# Altium PCB WCH-Link-R1-1v1.PcbDoc
Units mm, origin at the board's own origin, x right, y up, seen from the top; angles counter-clockwise.
Board outline 49.64 x 19.25 mm, 2 copper layers (Top Layer, Bottom Layer), stack 1.671 mm thick; 23 components, 21 nets, 75 pads, 156 vias.
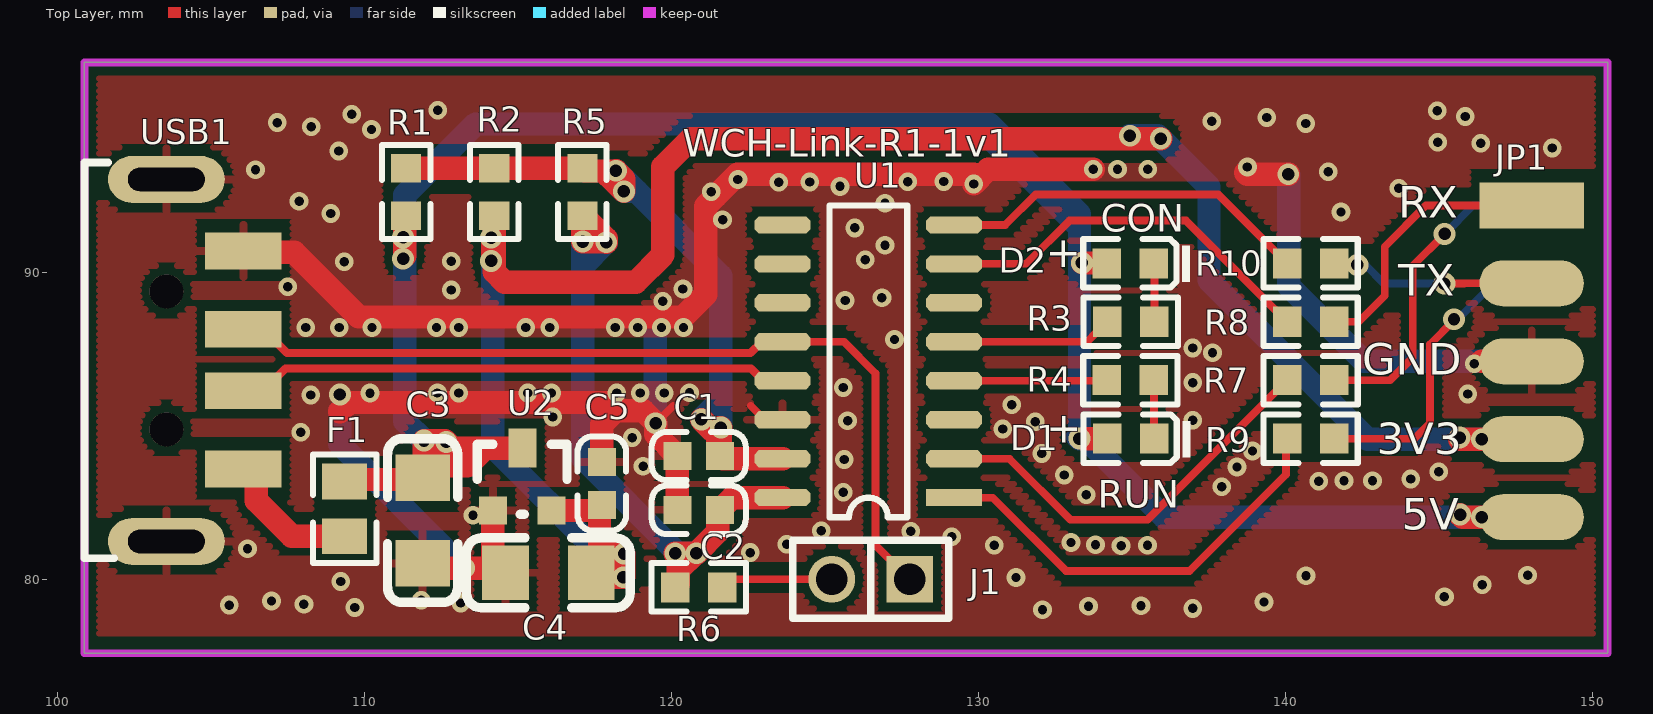
[diagram p0: Top Layer view]
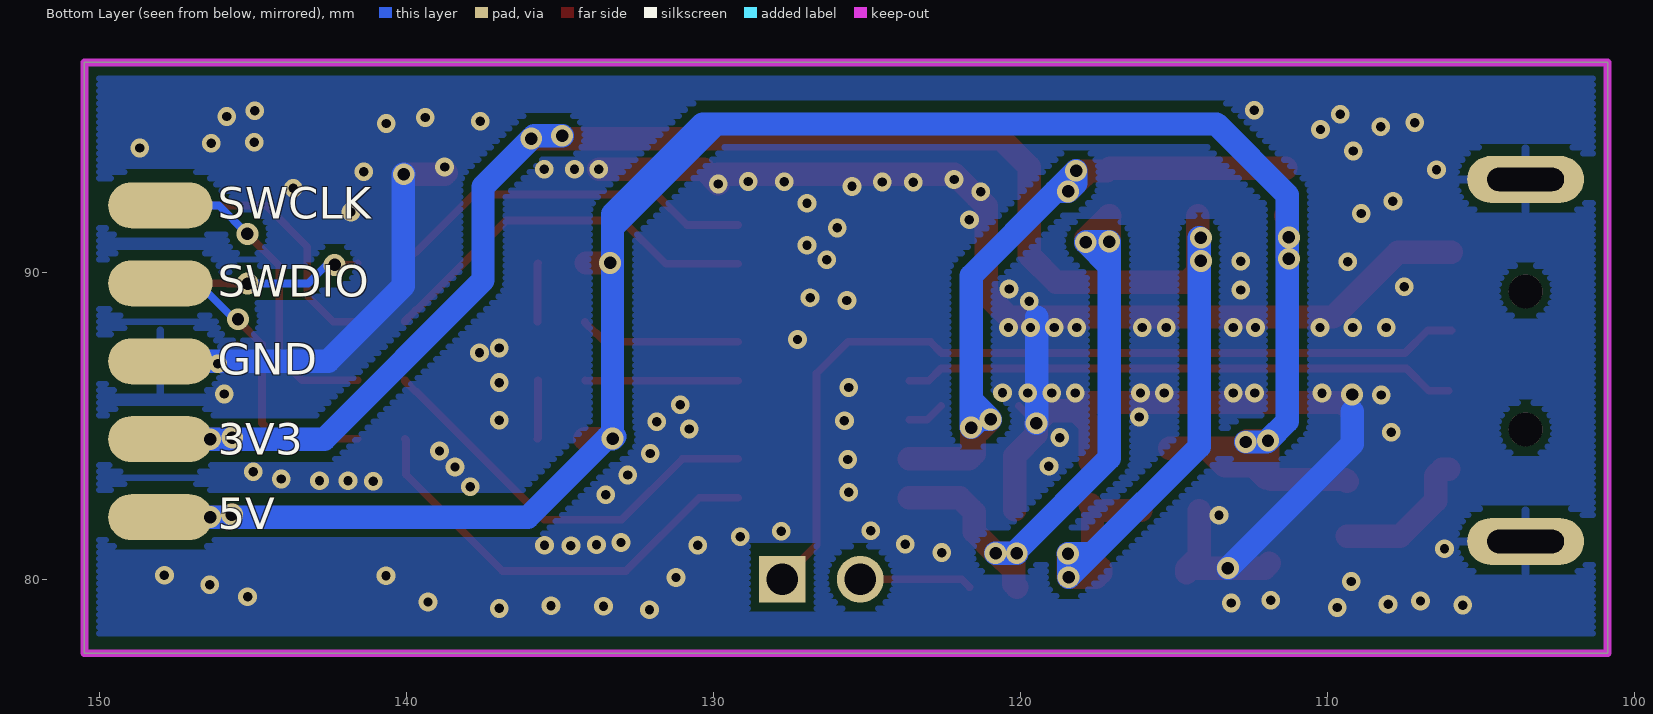
[diagram p1: Bottom Layer view, seen from below]

## Layer stack, top to bottom
Top Solder: solder mask 0.0102, Solder Resist, Dk 3.5
Top Layer: signal copper 0.0356
Dielectric 1: dielectric 1.6, FR-4, Dk 4.8
Bottom Layer: signal copper 0.0356
Bottom Solder: solder mask 0.0102, Solder Resist, Dk 3.5

## Board outline
100.867,77.591 150.507,77.591 150.507,96.844 100.867,96.844

## Design rules (kind name [scope] priority, off if disabled: settings)
Clearance Clearance_1 [InPolygon] p1: gap=0.254
Clearance [All] p2: gap=0.203
ComponentClearance [All] p1 off: gap=0.254 collisioncheckmode=3 verticalgap=0.254 showdistances=FALSE
MinimumSolderMaskSliver [All] p1 off: minsoldermaskwidth=0.254
PolygonConnect PolygonConnect_1 [IsVia] p1: connectstyle=Direct reliefconductorwidth=0.254 reliefentries=4 polygonreliefangle="90 Angle" airgapwidth=0.254
PolygonConnect [All] p2: connectstyle=Relief reliefconductorwidth=0.254 reliefentries=4 polygonreliefangle="90 Angle" airgapwidth=0.254
RoutingVias [All] p1: holewidth=0.406 width=0.711 viastyle="Through Hole" minholewidth=0.305 minwidth=0.61 maxholewidth=0.711 maxwidth=1.27
SilkToSilkClearance [All] p1 off: silktosilkclearance=0.254
SilkToSolderMaskClearance [IsPad] p1 off: minsilkscreentomaskgap=0.254 clearancetoexposedcopper=TRUE
SolderMaskExpansion [All] p1: expansion=0.102
UnpouredPolygon [All] p1: allowunpoured=FALSE
Width [All] p1: maxlimit=1.524 minlimit=0.203 preferedwidth=0.254
25 further rules are at their usual default settings.

## Components (designator, comment, footprint, x,y, rotation, side; value= is the part's Value field where it differs from the comment)
C1 "0.1uF" 0603_C 121.586,84.015 r180 top
C2 "0.1uF" 0603_C 121.586,82.262 r180 top
C3 "10uF" 3216_C 111.887,83.312 r90 top
C4 "10uF" 3216_C 117.384,80.21 r0 top
C5 "0.1uF" 0603_C 117.729,82.423 r90 top
D1 "RED" 0603+ 134.198,84.582 r0 top
D2 "BLUE" 0603+ 134.182,90.297 r0 top
F1 "500mA" 0805 109.347,81.407 r90 top
J1 "Header 2" SIP2-2.54MM 127.764,80 r270 top
JP1 "Header 5*2" IDCS10-2.54mm 148.034,92.185 r0 top
R1 "0" 0603 111.351,93.391 r270 top
R2 "0" 0603 114.224,93.391 r270 top
R3 "1K" 0603 134.198,88.392 r0 top
R4 "1K" 0603 134.182,86.487 r0 top
R5 "0" 0603 117.096,93.391 r270 top
R6 "4.7K" 0603 121.658,79.738 r180 top
R7 "1K" 0603 141.601,86.487 r180 top
R8 "1K" 0603 141.601,88.392 r180 top
R9 "1K" 0603 141.601,84.582 r180 top
R10 "1K" 0603 141.601,90.297 r180 top
U1 "CH549G" SOP16 129.21,82.66 r90 top
U2 "6219P33M" SOT-23 114.18,82.241 r0 top
USB1 "USB" USB-A-F/P_B 103.539,87.145 r270 top

## Footprints (in the part's own frame and the unit in brackets; to place one, negate y for a bottom-side part, rotate by r counter-clockwise, add the part's x,y. Pads: shape width x height; smd on the part's side, far side on the other; paste and mask are expansions set on the pad)
0603 [mm]
  rect 0.93x0.98 smd: 1(0,0) 2(1.54,0)
  silkscreen extent -0.76,-0.79 2.3,0.79
0603+ [mm]
  rect 0.93x0.98 smd: 1(0,0) 2(1.54,0)
  silkscreen extent -0.76,-0.79 2.72,0.79
0603_C [mil]
  rect 36x36 smd: 1(0,0) 2(55,0)
  silkscreen extent -33,-31 88,31
0805 [mm]
  rect 1.16x1.47 smd: 1(0,0) 2(1.78,0)
  silkscreen extent -0.88,-1.04 2.66,1.03
3216_C [mil]
  rect 60x70 smd: 1(0,0) 2(-110,0)
  silkscreen extent -160,-45 50,45
IDCS10-2.54mm [mm]
  rect 3.4x1.5 smd: 1(0,0)
  oval 3.4x1.5 smd far side: 2(0,0) 4(0,-2.54) 6(0,-5.08) 8(0,-7.62) 10(0,-10.16)
  oval 3.4x1.5 smd: 3(0,-2.54) 5(0,-5.08) 7(0,-7.62) 9(0,-10.16)
SIP2-2.54MM [mil]
  rect 60x60 hole 40: 1(0,0)
  round 60 hole 40: 2(0,-100)
  silkscreen extent -50,-150 50,50
SOP16 [mil]
  rect 22x72 smd: 1(0,0)
  oct 22x72 smd: 2(50,0) 3(100,0) 4(150,0) 5(200,0) 6(250,0) 7(300,0) 8(350,0) 9(350,220) 10(300,220) 11(250,220) 12(200,220) 13(150,220) 14(100,220) 15(50,220) 16(0,220)
  silkscreen extent -25,60 375,160
SOT-23 [mil]
  rect 36x36 smd: 1(0,0) 2(75,0)
  rect 36x50 smd: 3(38,80)
  silkscreen extent -20,-5 95,85
USB-A-F/P_B [mm] "A型USB 插头，20*13*4.5mm"
  round 1.1 hole 1.1: 0(-2.237,0) 0(2.263,0)
  rect 1.2x2.5 smd: 1(3.556,2.508) 2(1,2.508) 3(-1,2.508) 4(-3.556,2.508)
  oval 1.524x3.81 hole 0.762 slot 2.5 at 90 deg: 4(-5.887,0) 4(5.913,0)
  silkscreen extent -6.44,-2.67 6.46,-1.7, body extent -6.46,-17.9 6.49,2.7, height 3.25

## Part data
C1 C2: library part C0603, "Capacitor"
C3 C4 C5: library part CAP, "Capacitor"
D1 D2: library part D0603, "Typical RED, GREEN, YELLOW, AMBER GaAs LED"
F1: library part FUSE1, "Fuse"
J1: "Header, 2-Pin"
JP1: library part Header_5*2, "Header, 10Pin"
R1 R2 R3 R4 R5 R6 R7 R8 R9 R10: library part R0603, "Resistor"
U1: "8bit MCS51 MCU with ADC & USB type-C host & device & dual UART & SPI"
USB1: library part USB_G

## Via types
v1: diameter 0.61, hole 0.305, Top Layer to Bottom Layer, 124 vias
v2: diameter 0.711, hole 0.406, Top Layer to Bottom Layer, 32 vias

## Nets (pads, with @x,y where several pads share a name; then routed paths per layer and width w, separated by ;. In a path a pad name is that pad's centre, name@x,y a point inside that pad or via, vN(x,y) a via of type N, cw(c..) or ccw(c..) an arc to the next point about the centre after c; other vN are vias at no path point)
3V3: C4.1 C5.1 JP1.7 JP1.8 R2.2 U2.2 | length 71.9
  Top Layer w0.762: v2@114.177,91.128 114.177,90.499 v2@114.224,90.452 ; R2.2 v2@114.224,90.452 ; U2.2 117.547,82.241 C5.1@117.653,82.347 ; C5.1 C5.1@117.653,82.347 ; v2(135.942,94.363) 120.643,94.363 119.721,93.441 119.721,90.568 118.837,89.684 114.558,89.684 114.224,90.019 v2@114.224,90.452 ; v2@145.691,84.565 v2(146.41,84.565) JP1.7 JP1.7@148.95,84.565 ; C4.1 117.653,80.479 C4.1@117.653,80.606 ; C4.1 117.527,80.066 v2(118.433,80.066) 118.451,80.085 v2(118.451,80.831) 118.005,80.831 117.892,80.718 117.765,80.718 C4.1@117.653,80.606 ; C4.1 117.384,80.337 C4.1@117.653,80.606 ; C4.1@117.653,80.606 C5.1@117.653,82.347
  Bottom Layer w0.762: v2@114.177,91.128 114.177,84.322 117.668,80.831 ; v2(134.94,94.453) 135.852,94.453 v2(135.942,94.363) 137.517,92.788 137.517,89.74 142.692,84.565 145.691,84.565 v2(146.41,84.565) JP1.8 ; 117.668,80.831 v2(118.451,80.831) 118.433,80.812 v2(118.433,80.066) 117.668,80.831
  other v2: 145.691,84.615 114.122,90.376 114.122,91.128
5V: C3.1 D1.1 D2.1 F1.2 JP1.9 JP1.10 R1.2 U2.3 | length 76.7
  Top Layer w0.762: F1.2 109.409,83.25 111.825,83.25 C3.1 ; v2@111.303,90.537 111.303,91.803 R1.2 ; U2.3 113.926,84.273 ; v2@133.4,90.309 D2.1@134.16,90.309 ; v2@133.474,84.583 134.197,84.583 D1.1 ; v2(145.699,82.108) 145.782,82.025 v2(146.41,82.025) JP1.9 JP1.9@148.95,82.025 ; C3.1 C3.1@111.934,83.359 ; C3.1 112.014,83.312 C3.1@112.395,83.693 ; C3.1@111.934,83.359 112.268,83.693 C3.1@112.395,83.693 ; C3.1@111.934,83.359 v2(111.934,84.518) 112.617,84.518 v2(112.661,84.474) ; C3.1@112.395,83.693 112.395,83.82 112.661,84.086 v2(112.661,84.474) ; C3.1@112.395,83.693 113.346,83.693 113.926,84.273 ; v2(112.661,84.474) 112.862,84.273 113.926,84.273
  Bottom Layer w0.762: v2(112.661,84.474) 111.978,84.474 v2(111.934,84.518) 111.934,84.522 111.303,85.153 111.303,92.525 113.613,94.835 129.933,94.835 ; v2@133.228,84.651 v2@133.264,84.615 ; v2(146.41,82.025) 136.055,82.025 133.464,84.615 v2@133.296,84.615 ; 129.933,94.835 130.355,94.835 133.296,91.894 133.296,91.472 ; 129.933,94.835 133.296,91.472 ; v2@133.264,84.615 v2@133.296,84.615 ; v2@133.264,84.615 v2(133.296,84.583) v2@133.296,84.615 ; v2@133.296,84.615 133.296,91.472
  other v2: 133.375,90.309 111.252,90.444 111.252,91.143
5V_USB: F1.1 USB1.1 | length 4.7
  Top Layer w0.762: USB1.1 106.254,83.589 106.473,83.37 106.473,82.562 107.627,81.407 F1.1
D_SWCLK: R7.2 U1.2 | length 14.1
  Top Layer w0.254: U1.2 131.013,83.93 133.003,81.939 135.513,81.939 R7.2@139.698,86.124 ; R7.2@139.698,86.124 R7.2@139.723,86.124 ; R7.2@139.698,86.124 R7.2@139.723,86.124 ; R7.2@139.723,86.124 R7.2@140.061,86.462 ; R7.2@139.723,86.124 R7.2@140.061,86.462 ; R7.2@140.061,86.462 R7.2 R7.2@140.061,86.462
D_SWDIO: R9.2 U1.1 | length 14.3
  Top Layer w0.254: U1.1 130.472,82.66 132.859,80.273 136.886,80.273 140.023,83.41 140.023,84.544 R9.2
GND: C1.2 C2.2 C3.2 C4.2 C5.2 JP1.5 JP1.6 U1.14 U2.1 USB1.4 | length 80.3
  Top Layer w0.254: v2(119.483,85.083) 120.056,85.656 ; 122.584,85.656 123.04,85.2 U1.14
  Top Layer w0.762: USB1.4@105.952,90.652 107.702,90.652 109.806,88.549 110.239,88.549 112.343,88.549 113.065,88.549 115.25,88.549 116.035,88.549 118.167,88.549 118.897,88.549 119.464,88.549 119.673,88.549 120.384,88.549 121.115,89.279 121.115,92.162 121.441,92.488 122.149,93.197 123.499,93.197 124.503,93.197 127.699,93.197 128.874,93.197 129.851,93.197 ; 109.192,85.458 109.497,85.762 118.014,85.762 118.174,85.602 ; C3.2 112.041,80.364 v2(113.239,80.364) 114.436,80.364 C4.2 114.59,80.337 114.18,80.747 U2.1 ; C5.2 117.729,85.042 118.132,85.445 ; 118.132,85.492 119.074,85.492 v2(119.483,85.083) 119.483,84.721 C1.2 C2.2 ; v1(129.851,92.884) 130.328,93.361 v1(133.743,93.361) ; v1@138.714,93.252 138.769,93.197 v2(140.103,93.197) ; JP1.5@146.41,87.105 JP1.5@148.95,87.105
  Bottom Layer w0.762: 109.192,85.458 109.192,84.41 v2(113.239,80.364) ; 119.464,88.549 119.464,85.102 v2(119.483,85.083) ; v2(140.103,93.197) 140.113,93.186 140.113,89.557 142.566,87.105 JP1.6@146.41,87.105
  other v1: 132.089,79.009 136.99,79.05 109.673,79.079 133.592,79.118 105.587,79.159 135.299,79.134 108.02,79.185 113.134,79.224 139.308,79.259 106.962,79.291 111.846,79.32 145.189,79.434 146.422,79.819 109.223,79.926 131.228,80.058 140.676,80.114 147.9,80.127 122.57,80.869 106.182,80.997 134.652,81.089 130.523,81.107 135.511,81.106 133.817,81.125 123.759,81.142 133.018,81.2 129.13,81.389 127.799,81.561 124.883,81.576 113.531,82.085 133.517,82.757 125.595,82.835 137.931,83.014 141.099,83.196 141.916,83.208 142.847,83.215 144.096,83.267 132.796,83.398 145.006,83.508 138.43,83.656 119.074,83.68 125.627,83.904 132.065,84.099 138.935,84.182 118.723,84.617 107.914,84.791 130.798,84.895 131.855,85.13 125.739,85.165 136.986,85.187 116.127,85.29 131.089,85.687 108.24,86.006 145.948,86.039 110.174,86.067 112.371,86.073 113.065,86.073 115.32,86.073 116.089,86.073 118.212,86.073 118.984,86.073 119.764,86.073 120.585,86.075 125.595,86.251 136.986,86.41 146.157,87.022 137.633,87.383 136.986,87.537 127.268,87.816 108.077,88.205 109.168,88.205 110.239,88.205 112.343,88.205 113.065,88.205 115.25,88.205 116.035,88.205 118.167,88.205 118.897,88.205 119.673,88.205 120.391,88.205 119.713,89.061 125.657,89.084 126.857,89.179 112.824,89.428 120.372,89.459 107.488,89.532 109.331,90.352 112.824,90.362 126.316,90.412 126.956,90.889 125.97,91.45 121.665,91.719 108.892,91.919 141.818,91.97 126.956,92.251 107.863,92.321 121.295,92.634 143.702,92.747 125.493,92.803 123.499,92.941 124.503,92.945 127.699,92.959 128.874,92.962 122.165,93.029 141.4,93.285 106.444,93.347 134.535,93.361 135.52,93.361 138.769,93.435 109.156,93.959 148.7,94.055 146.373,94.211 144.972,94.242 110.225,94.658 108.258,94.751 140.667,94.855 107.147,94.883 137.603,94.93 139.397,95.049 145.869,95.083 109.583,95.159 112.382,95.283 144.958,95.273
  other v2: 109.192,86.022
LED_CON: R3.1 U1.5 | length 5.3
  Top Layer w0.254: U1.5 133.545,87.74 133.835,88.029 133.86,88.029 134.198,88.367 R3.1
LED_RUN: R4.1 U1.4 | length 5
  Top Layer w0.254: U1.4 R4.1@134.165,86.47 ; R4.1@134.173,86.47 R4.1@134.165,86.47 ; R4.1 R4.1@134.165,86.47
NetD1_2: D1.2 R4.2 | length 1.9
  Top Layer w0.254: R4.2 135.722,84.598 D1.2
NetD2_2: D2.2 R3.2 | length 1.9
  Top Layer w0.254: D2.2 135.738,90.281 R3.2
NetJ1_2: J1.2 R6.1 | length 3.7
  Top Layer w0.254: R6.1 121.919,80 J1.2
RX: JP1.1 R8.1 | length 7.3
  Top Layer w0.254: R8.1 142.397,88.392 143.246,89.241 143.246,90.839 144.591,92.185 JP1.1@146.41,92.185
SWCLK: JP1.2 R7.1 | length 10.5
  Top Layer w0.254: R7.1 143.416,86.487 144.155,87.227 144.155,90.213 v2(145.195,91.253)
  Bottom Layer w0.254: v2(145.195,91.253) 146.127,92.185 JP1.2
SWDIO: JP1.4 R9.1 | length 10.1
  Top Layer w0.254: R9.1 144.212,84.582 144.724,85.094 144.724,87.66 145.502,88.438 v2(145.502,88.472)
  Bottom Layer w0.254: v2(145.502,88.472) 145.626,88.472 146.798,89.645 JP1.4
TX: JP1.3 R10.1 | length 6.5
  Top Layer w0.254: R10.1 141.653,90.246 v2(142.353,90.246) ; v2(145.188,89.636) 145.834,89.636 145.826,89.645 JP1.3
  Bottom Layer w0.254: v2@142.607,90.246 143.216,89.636 v2(145.188,89.636)
UART0_RX: R8.2 U1.7 | length 12.8
  Top Layer w0.254: U1.7 131.56,90.28 132.969,91.688 136.765,91.688 139.698,88.755 139.723,88.755 140.061,88.417 R8.2
UART0_TX: R10.2 U1.8 | length 12.2
  Top Layer w0.254: U1.8 130.879,91.55 131.87,92.541 137.818,92.541 139.698,90.66 139.723,90.66 140.061,90.322 R10.2
USB_N: U1.13 USB1.2 | length 18
  Top Layer w0.254: USB1.2 106.697,86.145 107.42,86.868 122.588,86.868 122.987,86.47 U1.13
USB_P: J1.1 U1.12 USB1.3 | length 28.8
  Top Layer w0.254: USB1.3@105.952,88.112 106.731,88.112 107.466,87.376 122.572,87.376 122.936,87.74 U1.12 125.62,87.74 126.645,86.715 126.645,81.119 J1.1
V33: C2.1 R5.2 R6.2 U1.16 | length 23.2
  Top Layer w0.762: R6.2 120.113,79.743 120.224,79.854 120.224,80.289 ; v2(120.122,80.849) v2@120.783,80.849 ; v2@120.224,80.671 120.224,80.289 ; U1.16 121.984,82.66 C2.1 121.51,82.186 121.51,81.545 v2(120.814,80.849) v2@120.783,80.849 ; 120.224,80.289 v2@120.783,80.849 ; R5.2 117.106,91.841 v2(117.106,91.005) 117.852,91.005 v2(117.876,90.981) 117.876,91.096 117.121,91.851 R5.2
  Bottom Layer w0.762: v2(120.814,80.849) v2(120.122,80.849) 120.122,80.933 117.106,83.949 117.106,90.211 ; 117.106,90.211 v2(117.106,91.005) 117.852,91.005 v2(117.876,90.981) 117.106,90.211
VDD: C1.1 R1.1 R2.1 R5.1 U1.15 | length 26.4
  Top Layer w0.762: R1.1 R2.1 R5.1 117.18,93.307 117.785,93.307 ; v2(120.976,85.208) 121.24,84.944 ; U1.15 121.672,83.93 C1.1 ; 117.785,93.307 118.19,92.902 ; 117.785,93.307 v2@118.183,93.307 ; v2@118.183,93.307 v2(118.19,93.314) v2@118.19,93.3 ; v2@118.183,93.307 v2@118.19,93.3 ; 118.19,92.902 v2(118.45,92.642) 118.45,93.04 v2@118.19,93.3 ; 118.19,92.902 v2@118.19,93.3 ; 121.24,84.944 v2(121.609,84.944) 121.586,84.922 C1.1 ; 121.24,84.944 121.51,84.674 121.51,84.091 C1.1
  Bottom Layer w0.762: 118.862,92.642 v2(118.45,92.642) 118.19,92.902 v2(118.19,93.314) 118.862,92.642 ; 118.862,92.642 121.609,89.895 121.609,85.841 ; 121.609,85.841 v2(120.976,85.208) 121.345,85.208 v2(121.609,84.944) 121.609,85.841
pads on no net: U1.3 U1.6 U1.9 U1.10 U1.11 USB1.0

## Polygon pours and split planes (outlines as drawn)
GND on Bottom Layer "GND_L02_P-001" (hatched Horizontal grid 0.203 track 0.203, remove dead copper, pour order 1): 100.837,96.767 150.607,96.767 150.607,77.597 100.89,77.597
GND on Top Layer "GND_L02_P-001" (hatched Horizontal grid 0.203 track 0.203, remove dead copper, pour order 0): 100.84,96.843 100.84,77.534 150.607,77.534 150.607,96.843

## Keep-outs
Keep-Out Layer:
  the board outline again, w0.254

## Silkscreen, mask and mechanical layers (free items; w line width, h text height)
Top Overlay:
  text "WCH-Link-R1-1v1" at 120.374,93.777 h0.89
  text "RX" at 143.692,91.448 h1.78
  text "CON" at 133.997,91.327 h0.89
  text "TX" at 143.692,88.905 h1.78
  text "GND" at 142.505,86.315 h1.78
  text "3V3" at 142.992,83.73 h1.78
  text "RUN" at 133.889,82.324 h0.89
  text "5V" at 143.792,81.274 h1.78
Bottom Overlay:
  text "SWCLK" at 146.164,91.412 h1.78
  text "SWDIO" at 146.164,88.871 h1.78
  text "GND" at 146.164,86.33 h1.78
  text "3V3" at 146.164,83.718 h1.78
  text "5V" at 146.164,81.281 h1.78

## Text inside footprints (layer, text, board x,y; h text height)
D1: Top Overlay "+" at 133.231,84.303 h1.02 r90
D2: Top Overlay "+" at 133.215,90.018 h1.02 r90